# EAGLE board LPC_2TE_3.5g (EAGLE 5.04)
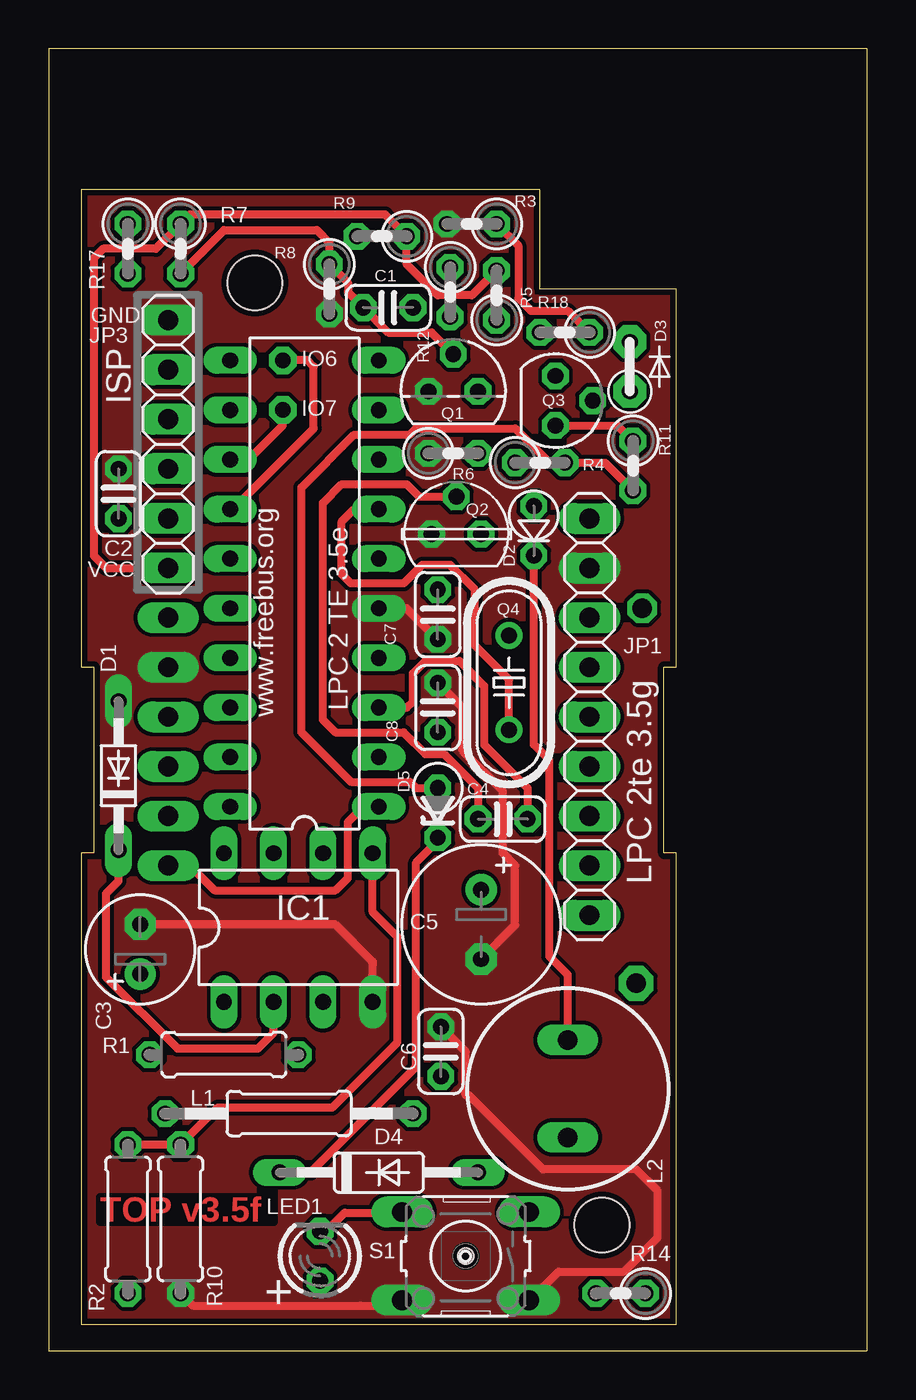
[diagram p0: board, top side]
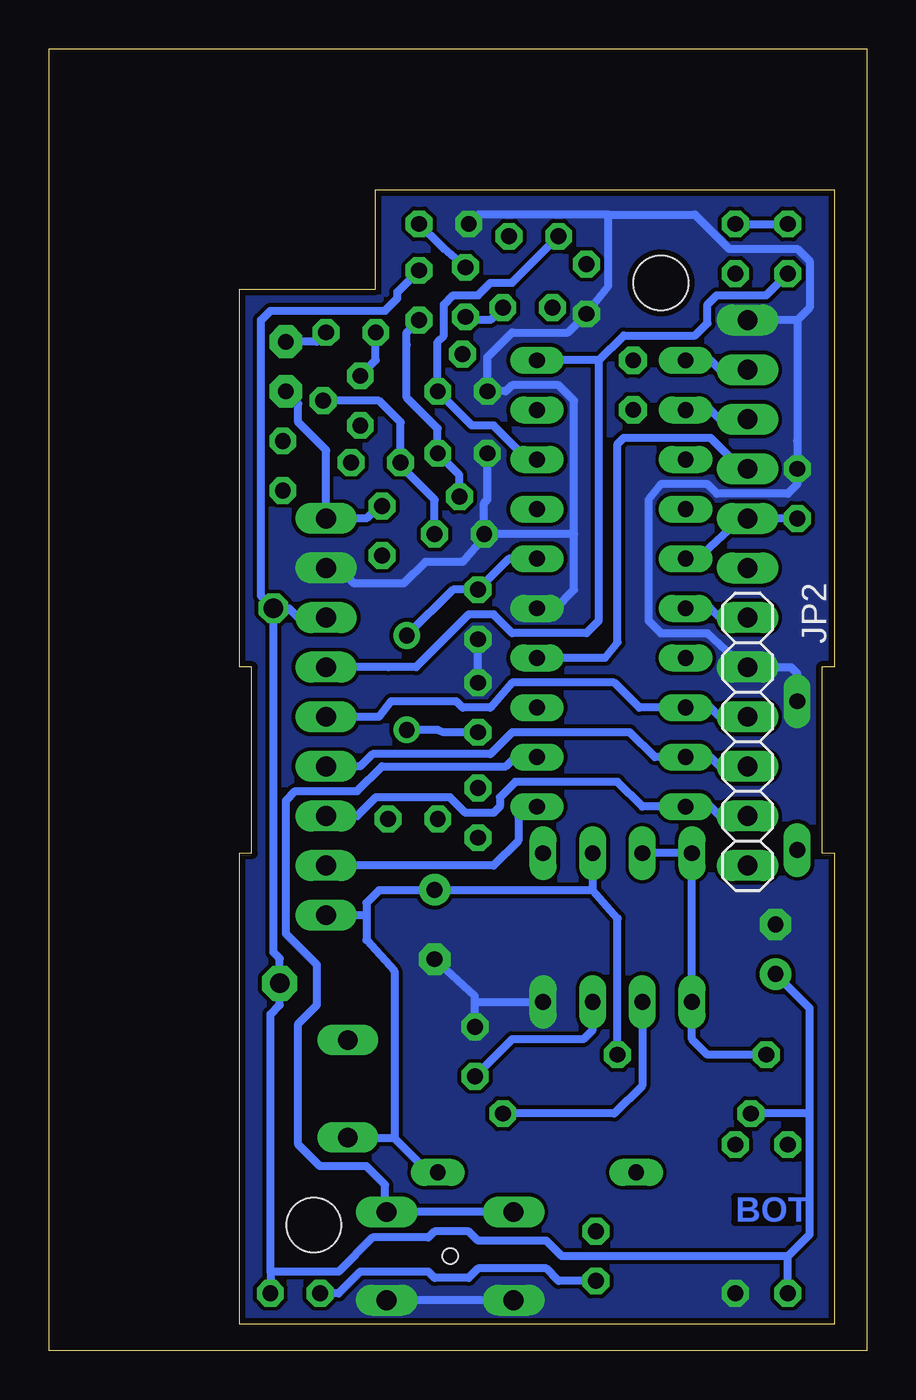
[diagram p1: board, bottom side, seen from below]

Size 41.91 x 66.67 mm. Coordinates in mm from the lower left corner, seen from the top.
Outline: 1.67,1.35 32.15,1.35 32.15,25.48 31.51,25.48 31.51,35 32.15,35 32.15,54.37 25.16,54.37 25.16,59.45 1.67,59.45 1.67,35 2.3,35 2.3,25.48 1.67,25.48 1.67,1.35
Outline: 41.91,66.68 0,66.68 0,0 41.91,0 41.91,66.68
Copper layers (1*16): Top 0.035mm / dielectric 1.5mm / Bottom 0.035mm
Design rules "default_freebus": minimum track width 10mil, minimum drill 24mil, track to track 8mil, track to pad 8mil, pad to pad 8mil, via to via 8mil, smd to smd 8mil, copper to edge 12mil, drill to drill 8mil, minimum pad ring 11mil, minimum via ring 8mil, stop-mask expansion 4mil, vias tented up to drill 0mil, thermal gap 10mil
Holes 2.8 mm at 28.34,6.43 10.56,54.69
Holes 0.8 mm at 21.35,4.84

## Footprints (pad centres in the part's own frame; a part is rotated, then mirrored left to right if it is on the bottom)
DIL20@1 = drill 0.813 long: 1 -11.43,-3.81; 2 -8.89,-3.81; 3 -6.35,-3.81; 4 -3.81,-3.81; 5 -1.27,-3.81; 6 1.27,-3.81; 7 3.81,-3.81; 8 6.35,-3.81; 9 8.89,-3.81; 10 11.43,-3.81; 11 11.43,3.81; 12 8.89,3.81; 13 6.35,3.81; 14 3.81,3.81; 15 1.27,3.81; 16 -1.27,3.81; 17 -3.81,3.81; 18 -6.35,3.81; 19 -8.89,3.81; 20 -11.43,3.81
C025-024X044 = drill 0.813 octagon: 1 -1.27,0; 2 1.27,0
E2,5-6 = drill 0.813 pad 1.6 round: + -1.27,0 | drill 0.813 pad 1.6 octagon: - 1.27,0
E3,5-8 = drill 0.813 pad 1.6 round: + -1.778,0 | drill 0.813 pad 1.6 octagon: - 1.778,0
DO34-7 = drill 0.813 long: A 3.81,0; C -3.81,0
D-2.5 = drill 0.813 octagon: A 1.27,0; C -1.27,0
DO35-S = drill 0.8 pad 1.676 octagon: P$1 -1.27,0; P$2 1.27,0
DO35-10 = drill 0.813 long: A 5.08,0; C -5.08,0
ZDIODE = drill 0.813 octagon: A 1.27,0; C -1.27,0
DIL08 = drill 0.813 long: 1 -3.81,-3.81; 2 -1.27,-3.81; 3 1.27,-3.81; 4 3.81,-3.81; 5 3.81,3.81; 6 1.27,3.81; 7 -1.27,3.81; 8 -3.81,3.81
1X09 = drill 1.016 long: 1 -10.16,0; 2 -7.62,0; 3 -5.08,0; 4 -2.54,0; 5 0,0; 6 2.54,0; 7 5.08,0; 8 7.62,0; 9 10.16,0
1X06 = drill 1.016 long: 1 -6.35,0; 2 -3.81,0; 3 -1.27,0; 4 1.27,0; 5 3.81,0; 6 6.35,0
0207/12 = drill 0.813 octagon: 1 -6.35,0; 2 6.35,0
BS11 = drill 1 long: 1 -2.5,0; 2 2.5,0
LED3MM = drill 0.813 octagon: A -1.27,0; K 1.27,0
TO92 = drill 0.813 octagon: 1 1.27,0; 2 0,1.905; 3 -1.27,0
TO237 = drill 0.813 octagon: 1 1.27,0; 2 0,1.905; 3 -1.27,0
SOT54D = drill 0.813 octagon: B 1.27,0; C 0,1.905; E -1.27,0
HC49/S = drill 0.813 round: 1 -2.413,0; 2 2.413,0
0207/7 = drill 0.813 octagon: 1 -3.81,0; 2 3.81,0
0207/2V = drill 0.813 octagon: 1 -1.27,0; 2 1.27,0
B3F-10XX = drill 1.016 long: 1 -3.251,2.261; 2 3.251,2.261; 3 -3.251,-2.261; 4 3.251,-2.261

## Placement (x,y rotation side)
89LPC922  89LPC922  [DIL20@1]  13.1,39.29 90 top
C1  100n  [C025-024X044]  17.38,53.42 180 top
C2  100n  [C025-024X044]  3.57,43.89 270 top
C3  100µ  [E2,5-6]  4.68,20.56 90 top
C4  100n  [C025-024X044]  23.26,27.23 0 top
C5  100µ  [E3,5-8]  22.15,21.83 270 top
C6  470p  [C025-024X044]  20.08,15.32 90 top
C7  33p  [C025-024X044]  19.92,37.7 270 top
C8  33p  [C025-024X044]  19.92,32.94 90 top
D1  BAT46  [DO34-7]  3.57,29.45 90 top
D2  1N4148  [D-2.5]  24.84,41.99 90 top
D3  1N4148  [DO35-S]  29.77,50.4 90 top
D4  1N4148  [DO35-10]  16.91,9.13 0 top
D5  7V5  [ZDIODE]  19.92,27.54 90 top
IC1  MC34063AP  [DIL08]  12.78,21.67 0 top
JP1  [1X09]  27.7,32.46 270 top
JP2  [1X06]  6.11,31.19 90 bottom
JP3  [1X06]  6.11,46.43 90 top
L1  220µ  [0207/12]  12.3,12.14 180 top
L2  150mH  [BS11]  26.59,13.41 270 top
LED1  [LED3MM]  13.89,4.84 90 top
Q1  BC557  [TO92]  20.72,49.13 0 top
Q2  2N7000  [TO237]  20.88,41.83 0 top
Q3  BC640  [SOT54D]  25.96,48.66 270 top
Q4  7,3728  [HC49/S]  23.57,34.21 270 top
R1  3R3  [0207/7]  8.97,15.16 0 top
R2  3k6  [0207/7]  4.05,6.75 270 top
R3  100k  [0207/2V]  21.67,57.71 180 top
R4  5k6  [0207/2V]  25.16,45.48 0 top
R5  22k  [0207/2V]  22.94,54.05 90 top
R6  12k  [0207/2V]  20.72,45.96 0 top
R7  82k  [0207/2V]  6.75,56.44 270 top
R8  47k  [0207/2V]  14.37,54.37 270 top
R9  10k  [0207/2V]  17.07,57.07 180 top
R10  2k2  [0207/7]  6.75,6.75 90 top
R11  100  [0207/2V]  29.92,45.32 270 top
R12  10k  [0207/2V]  20.56,54.21 270 top
R14  1k  [0207/2V]  29.29,2.94 180 top
R17  47k  [0207/2V]  4.05,56.44 270 top
R18  12  [0207/2V]  26.43,52.15 180 top
S1  [B3F-10XX]  21.35,4.84 180 top

## Library data of the parts
89LPC922 = micro-philips
C1-C8 L1 R1-R12 R14 R17 R18 = rcl
D1 D2 D4 D5 = diode
D3 = kubi
IC1 = mc34063
JP1-JP3 = pinhead
L2 = inductor-neosid
LED1 = led
Q1 = transistor-pnp
Q2 = transistor-fet
Q3 = transistor-small-signal
Q4 = crystal
S1 = switch-omron

## Nets
EIB+: D2.A D3.P$1 JP1.1
GND: 89LPC922.5 C2.1 C3.- C5.- C6.2 C7.2 C8.2 D1.A IC1.4 JP1.2 JP2.5 JP3.6 Q1.3 Q2.3 R3.2 R6.1 R8.2 R10.1 S1.1 S1.2
N$1: 89LPC922.8 Q1.1 R9.2
N$2: C1.2 Q1.2 R7.2 R8.1
N$3: 89LPC922.7 C8.1 Q4.2
N$4: D3.P$2 R3.1 R12.1 R18.1
N$5: 89LPC922.3 C4.2
N$6: 89LPC922.6 C7.1 Q4.1
N$7: 89LPC922.2 LED1.K S1.3 S1.4
N$8: IC1.1 IC1.7 IC1.8 R1.1
N$9: LED1.A R14.2
N$10: C5.+ D4.A IC1.6 JP1.9 L2.2 R1.2
N$11: IC1.5 R2.1 R10.2
N$12: D1.C IC1.2 L1.1
N$13: D2.C L2.1
N$14: C6.1 IC1.3
N$15: D4.C D5.C
N$16: C1.1 R12.2
N$25: D5.A R4.2 R11.2
N$26: Q2.1 Q3.C R4.1
N$28: Q3.B R11.1
N$29: 89LPC922.12 JP3.4
N$30: 89LPC922.11 JP3.5
N$31: 89LPC922.4 JP3.3
N$32: 89LPC922.15 C2.2 JP3.2
N$33: Q3.E R18.2
N$34: C4.1 Q2.2 R5.1 R6.2
P0.0: 89LPC922.1 JP1.8 JP2.1
P0.1: 89LPC922.20 JP1.7 JP2.2
P0.2: 89LPC922.19 JP1.6 JP2.3
P0.3: 89LPC922.18 JP1.5 JP2.4
P0.5: 89LPC922.16 JP2.6
PWM: 89LPC922.10 JP1.4 R17.2
VCC: C3.+ JP1.3 JP3.1 L1.2 R2.2 R5.2 R7.1 R9.1 R14.1 R17.1

## Tracks (layer width: path | path; a pad name or v marks a point on that pad's centre or on a via)
EIB+
  Bottom 0.406: D3.P$1 29.13,48.5 29.13,47.55 27.7,46.12 JP1.1 | D2.A 25,43.26 25.64,42.62 26.59,42.62 26.75,42.62 JP1.1 | JP1.1 | JP1.1
GND
  Top 0.406: 89LPC922.5 18.34,38.02 C7.2 | 15.95,2.3 16.91,2.3 17.38,2.58 S1.2 | 15.95,2.3 7.38,2.3 R10.1 | R10.1 | R10.1 | R10.1 | C6.2 | C6.2 21.35,15.32 21.35,13.1 21.51,13.1 25.32,9.29 30.08,9.29 31.19,8.18 31.19,5.79 29.45,4.05 26.11,4.05 24.65,2.58 S1.1 | C6.2 | IC1.4 | IC1.4 16.59,19.76 16.59,19.92 14.68,21.83 C3.- | C3.- | C8.2 21.19,32.94 21.19,30.72 23.26,28.65 23.26,25.48 23.89,24.84 23.89,21.8 C5.-
  Bottom 0.406: 15,41.83 18.18,41.83 18.49,41.83 Q2.3 | 15,41.83 15,48.66 15.8,49.45 18.18,49.45 18.49,49.13 Q1.3 19.45,50.88 18.18,52.15 15.32,52.15 R8.2 13.26,54.53 13.25,54.69 13.26,58.18 | 89LPC922.5 15.95,38.02 15,38.97 15,41.83 | Q2.3 | Q2.3 19.61,43.42 19.45,43.58 R6.1 | 3.57,46.59 3.57,44.37 4.05,43.89 7.7,43.89 8.18,44.37 10.56,44.37 11.19,43.58 11.19,37.39 10.56,36.75 8.18,36.75 6.27,35 JP2.5 4.52,35 3.89,35 3.57,34.69 D1.A | 3.57,52.78 3.57,46.59 | 3.57,52.78 JP3.6 | 13.26,58.18 8.81,58.18 7.06,56.44 3.57,56.44 2.94,55.8 | 19.61,41.67 20.72,40.4 22.62,40.4 23.73,39.29 24.84,39.29 26.27,39.29 27.07,40.08 JP1.2 | 13.26,58.18 15.64,58.18 19.92,58.18 R3.2 | C2.1 3.57,45.48 3.57,46.59 | 3.57,52.78 2.94,53.42 2.94,55.8 | 2.94,55.8 | C8.2 C7.2 | D1.A | D1.A | 23.26,2.58 S1.1 | S1.2 23.26,2.58 | 23.26,2.58 23.26,2.62 | 19.61,41.67 | Q2.3 19.61,41.67 | C6.2 | 20.08,17.86 IC1.4 | C6.2 20.08,17.86 | C5.- 20.08,18.15 20.08,17.86
  pour Bottom (no thermals): 1.67,59.45 25.16,59.45 25.16,54.37 32.15,54.37 32.15,35 31.51,35 31.51,25.48 32.15,25.48 32.15,1.35 1.67,1.35 1.67,25.48 2.3,25.48 2.3,35 1.67,35
  pour Top (no thermals): 1.67,59.45 25.16,59.45 25.16,54.37 32.15,54.37 32.15,35 31.51,35 31.51,25.48 32.15,25.48 32.15,1.35 1.67,1.35 1.67,25.48 2.3,25.48 2.3,35 1.67,35
N$1
  Bottom 0.406: 89LPC922.8 17.38,45.64 | 17.38,45.64 | 17.38,45.64 19.13,47.39 20.24,47.39 Q1.1 21.99,51.67 21.67,51.99 21.67,53.42 21.67,53.58 21.19,54.05 19.92,54.05 19.29,54.69 18.18,54.69 R9.2
N$2
  Top 0.406: Q1.2 19.61,52.15 17.38,52.15 C1.2 15.48,54.05 15.32,54.21 15.32,54.69 R8.1 | R8.1 14.37,56.75 13.73,57.39 8.97,57.39 8.49,56.91 R7.2 | R7.2 | R7.2 | R8.1
N$3
  Top 0.406: 89LPC922.7 15.95,43.1 15.64,43.1 15,42.47 15,39.77 15.48,39.29 18.18,39.29 19.13,40.24 20.56,40.24 21.83,38.97 21.83,36.12 23.57,34.37 Q4.2
  Bottom 0.406: Q4.2 21.99,31.8 21.67,31.67 C8.1
N$4
  Top 0.406: R18.1 26.59,53.26 24.69,53.26 24.05,53.9 24.05,56.59 R3.1
  Bottom 0.406: D3.P$2 28.18,51.67 R18.1 | R12.1 21.67,56.44 21.83,56.59 | R3.1 | R3.1 | 21.83,56.59 | 21.83,56.59 R3.1
N$5
  Top 0.406: C4.2 24.53,28.81 22.3,31.04 22.3,31.19 22.3,34.05 21.03,35.32 19.29,35.32 18.65,34.69 18.65,33.26 18.34,32.94 89LPC922.3
N$6
  Bottom 0.406: Q4.1 21.19,38.97 C7.1 18.34,40.56 17.07,40.56 89LPC922.6
N$7
  Top 0.406: LED1.K 14.21,6.11 15.16,7.06 17.86,7.06 17.9,7.1 S1.4
  Bottom 0.406: 17.19,7.1 17.54,7.06 17.62,7.15 S1.4 S1.3 24.69,7.1 | 89LPC922.2 17.38,30.4 18.02,30.4 18.49,29.92 24.84,29.92 26.11,28.65 29.29,28.65 29.77,28.18 29.77,21.35 28.18,19.76 28.18,17.7 29.13,16.75 29.13,10.56 28.02,9.45 25.64,9.45 24.69,8.49 | 24.69,7.1 24.69,7.06 | 24.69,8.49 | 24.69,7.1 24.69,8.49
N$8
  Bottom 0.406: IC1.7 | IC1.8 IC1.7 | IC1.7 | IC1.8 | IC1.1 IC1.8 | R1.1 6.91,15.16 8.18,15.16 8.97,15.95 IC1.1 | IC1.1 | IC1.1
N$9
  Bottom 0.406: LED1.A 15.8,3.57 16.43,4.21 19.92,4.21 20.4,3.73 22.15,3.73 22.46,4.05 25.95,4.05 27.07,2.94 R14.2
N$10
  Bottom 0.406: IC1.6 | IC1.6 | 14.05,23.57 IC1.6 | D4.A 22.46,9.13 24.21,10.87 | L2.2 26.59,10.87 24.21,10.87 | 25.64,22.3 JP1.9 | 25.64,22.3 25.64,21.03 24.21,19.45 24.21,10.87 | 14.05,23.57 22.15,23.57 | 22.15,23.57 25,23.57 25.64,22.94 25.64,22.3 | 25.64,22.3 | R1.2 12.78,15.32 12.78,22.15 14.05,23.57 | C5.+ | 22.15,23.57 C5.+
N$11
  Top 0.406: IC1.5 | IC1.5 | IC1.5 16.59,22.46 17.86,21.19 17.86,15.8 14.53,12.46 8.65,12.46 R10.2 4.21,10.56 R2.1 | R2.1
N$12
  Top 0.406: IC1.2 11.51,16.27 10.72,15.48 6.59,15.48 2.94,19.13 2.94,23.42 3.57,24.05 D1.C
  Bottom 0.406: IC1.2 | IC1.2 | L1.1 12.94,12.14 11.51,13.57 IC1.2
N$13
  Top 0.406: D2.C 24.84,40.24 24.84,31.04 25.64,30.24 25.64,20.2 26.59,19.25 26.59,16.91 26.59,16.07 L2.1
N$14
  Bottom 0.406: IC1.3 | IC1.3 14.05,16.43 14.53,15.95 18.18,15.95 19.13,15 C6.1 | C6.1
N$15
  Top 0.406: D4.C 13.41,9.13 18.81,14.53 18.81,25 19.76,25.96 | 19.76,25.96 D5.C | 19.76,25.96
N$16
  Bottom 0.406: R12.2 20.88,52.78 19.29,52.78 C1.1
N$25
  Top 0.406: R11.2 28.5,45.48 27.23,45.48 R4.2 26.27,45.48 25.64,45.48 25.16,45.96 23.89,47.23 18.81,47.23 18.49,46.91 15.64,46.91 12.94,44.21 12.94,31.67 15.48,29.13 18.49,29.13 18.81,28.81 19.76,28.81 D5.A
N$26
  Bottom 0.406: Q3.C 25,48.66 23.89,47.55 23.89,45.32 | Q2.1 22.15,43.58 23.89,45.32 | 23.89,45.32 R4.1
N$28
  Top 0.406: R11.1 29.13,47.39 26.43,47.39 Q3.B
N$29
  Bottom 0.406: JP3.4 7.54,47.7 8.02,48.18 89LPC922.12
N$30
  Bottom 0.406: JP3.5 7.54,50.24 8.02,50.72 89LPC922.11
N$31
  Bottom 0.406: 89LPC922.4 13.41,35.48 12.78,36.27 12.78,46.43 12.46,46.75 8.02,46.75 6.43,45.16 JP3.3
N$32
  Bottom 0.406: JP3.2 6.43,42.62 8.65,40.56 89LPC922.15 | JP3.2 | C2.2 4.84,42.62 JP3.2
N$33
  Bottom 0.406: Q3.E | Q3.E | Q3.E 25.16,50.72 R18.2
N$34
  Top 0.406: 15,44.37 14.05,43.42 14.05,32.31 14.68,31.67 17.86,31.67 18.18,31.67 19.29,30.56 20.24,30.56 21.99,28.81 C4.1 | 15,44.37 | 15,44.37 18.34,44.37 18.97,43.74 Q2.2
  Bottom 0.406: Q2.2 20.88,44.85 R6.2 21.99,47.23 23.57,48.82 23.57,51.51 23.57,52.15 R5.1
P0.0
  Top 0.406: JP2.1 7.22,24.84 8.49,23.57 14.68,23.57 15.32,24.21 15.32,27.07 | 15.32,27.07 | 15.32,27.07 16.11,27.86 16.59,27.86 89LPC922.1 | 89LPC922.1
  Bottom 0.406: JP1.8 19.13,24.84 17.86,26.11 17.86,27.38 17.38,27.86 89LPC922.1
P0.1
  Bottom 0.406: JP2.2 7.54,27.38 8.02,27.86 89LPC922.20 9.45,27.86 | JP1.7 26.11,27.38 25.16,28.34 21.35,28.34 20.56,27.54 19.13,27.54 18.81,27.86 18.81,28.34 18.02,29.13 12.78,29.13 11.51,27.86 9.45,27.86 | 9.45,27.86
P0.2
  Bottom 0.406: JP2.3 7.54,29.92 8.02,30.4 89LPC922.19 | JP1.6 25.96,29.92 25.32,30.56 19.29,30.56 18.18,31.67 12.14,31.67 10.87,30.4 89LPC922.19 | 89LPC922.19 | 89LPC922.19
P0.3
  Bottom 0.406: JP1.5 25,32.46 24.37,33.26 21.03,33.26 20.72,32.94 19.29,32.94 18.18,34.21 12.94,34.21 11.67,32.94 89LPC922.18 8.02,32.94 7.54,32.46 JP2.4
P0.5
  Bottom 0.406: 8.02,38.02 8.18,38.02 | 8.02,38.02 8.33,38.02 89LPC922.16 | JP2.6 | JP2.6 7.54,37.54 8.02,38.02
P0.6  (via drill 0.8 pad 1.42)
  Top 0.406: 9.45,43.1 13.57,47.23 13.57,50.4 13.26,50.72 v11.99,50.72
P0.7  (via drill 0.8 pad 1.42)
  Top 0.406: 9.29,45.64 10.24,45.64 11.99,47.39 v11.99,48.18
PWM
  Bottom 0.406: 13.73,50.72 13.73,37.39 14.37,36.75 18.18,36.75 19.13,37.7 20.4,37.7 23.1,35 24.53,35 JP1.4 | 13.73,50.72 89LPC922.10 | 13.73,50.72 12.46,51.99 8.81,51.99 8.18,52.63 8.18,53.58 7.7,54.05 5.16,54.05 R17.2
VCC  (via drill 1, 1 pad 1.78)
  Top 0.406: R9.1 17.22,58.18 7.22,58.18 R7.1 | R7.1 | R5.2 21.67,54.05 19.92,54.05 18.34,55.64 R9.1 | R9.1 | R7.1 | R7.1 5.48,56.44 2.78,56.44 2.3,55.96 2.3,40.72 2.94,40.08 JP3.1 | JP3.1
  Bottom 0.406: 24.05,53.9 24.05,54.21 | 24.05,53.9 24.69,53.26 30.56,53.26 31.04,52.78 31.04,38.66 v30.4,38.02 | 30.56,4.05 R14.1 | 16.43,5.64 19.92,5.64 20.4,6.11 22.15,6.11 22.46,5.79 25.32,5.79 27.07,4.05 30.56,4.05 | JP1.3 29.13,37.54 29.61,38.02 v30.4,38.02 | v30.4,38.02 30.4,35.16 30.4,34.85 30.4,20.4 30.08,20.08 30.08,19.61 v30.08,18.81 30.08,17.7 30.56,17.22 30.56,4.21 | v30.4,38.02 | 30.56,4.21 | 30.56,4.05 30.56,4.21 | 4.05,4.84 7.86,4.84 10.4,4.84 13.89,4.84 15.64,4.84 16.43,5.64 | 2.94,12.14 2.94,5.95 4.05,4.84 | 4.05,4.84 | C3.+ 2.94,17.54 2.94,12.14 | 2.94,12.14 L1.2 | R2.2 | R2.2 4.05,4.84 | 24.05,53.9 24.05,54.21 R5.2 | R7.1 | R7.1 | R7.1 R17.1 | R7.1 | 16.43,5.64 16.75,5.64 | 16.43,5.64 16.59,5.64

## Text on the board
Top: TOP v3.5f
Bottom: BOT
tPlace: IO6 | IO7 | +
tNames: GND | ISP | VCC | www.freebus.org | LPC 2 TE 3.5e | LPC 2te 3.5g